# Altium PCB stm32c8t6.PcbDoc
Units mil, origin at the board's own origin, x right, y up, seen from the top; angles counter-clockwise.
Board outline 1600 x 1600 mil, 2 copper layers (Top Layer, Bottom Layer); 36 components, 50 nets, 186 pads, 52 vias.
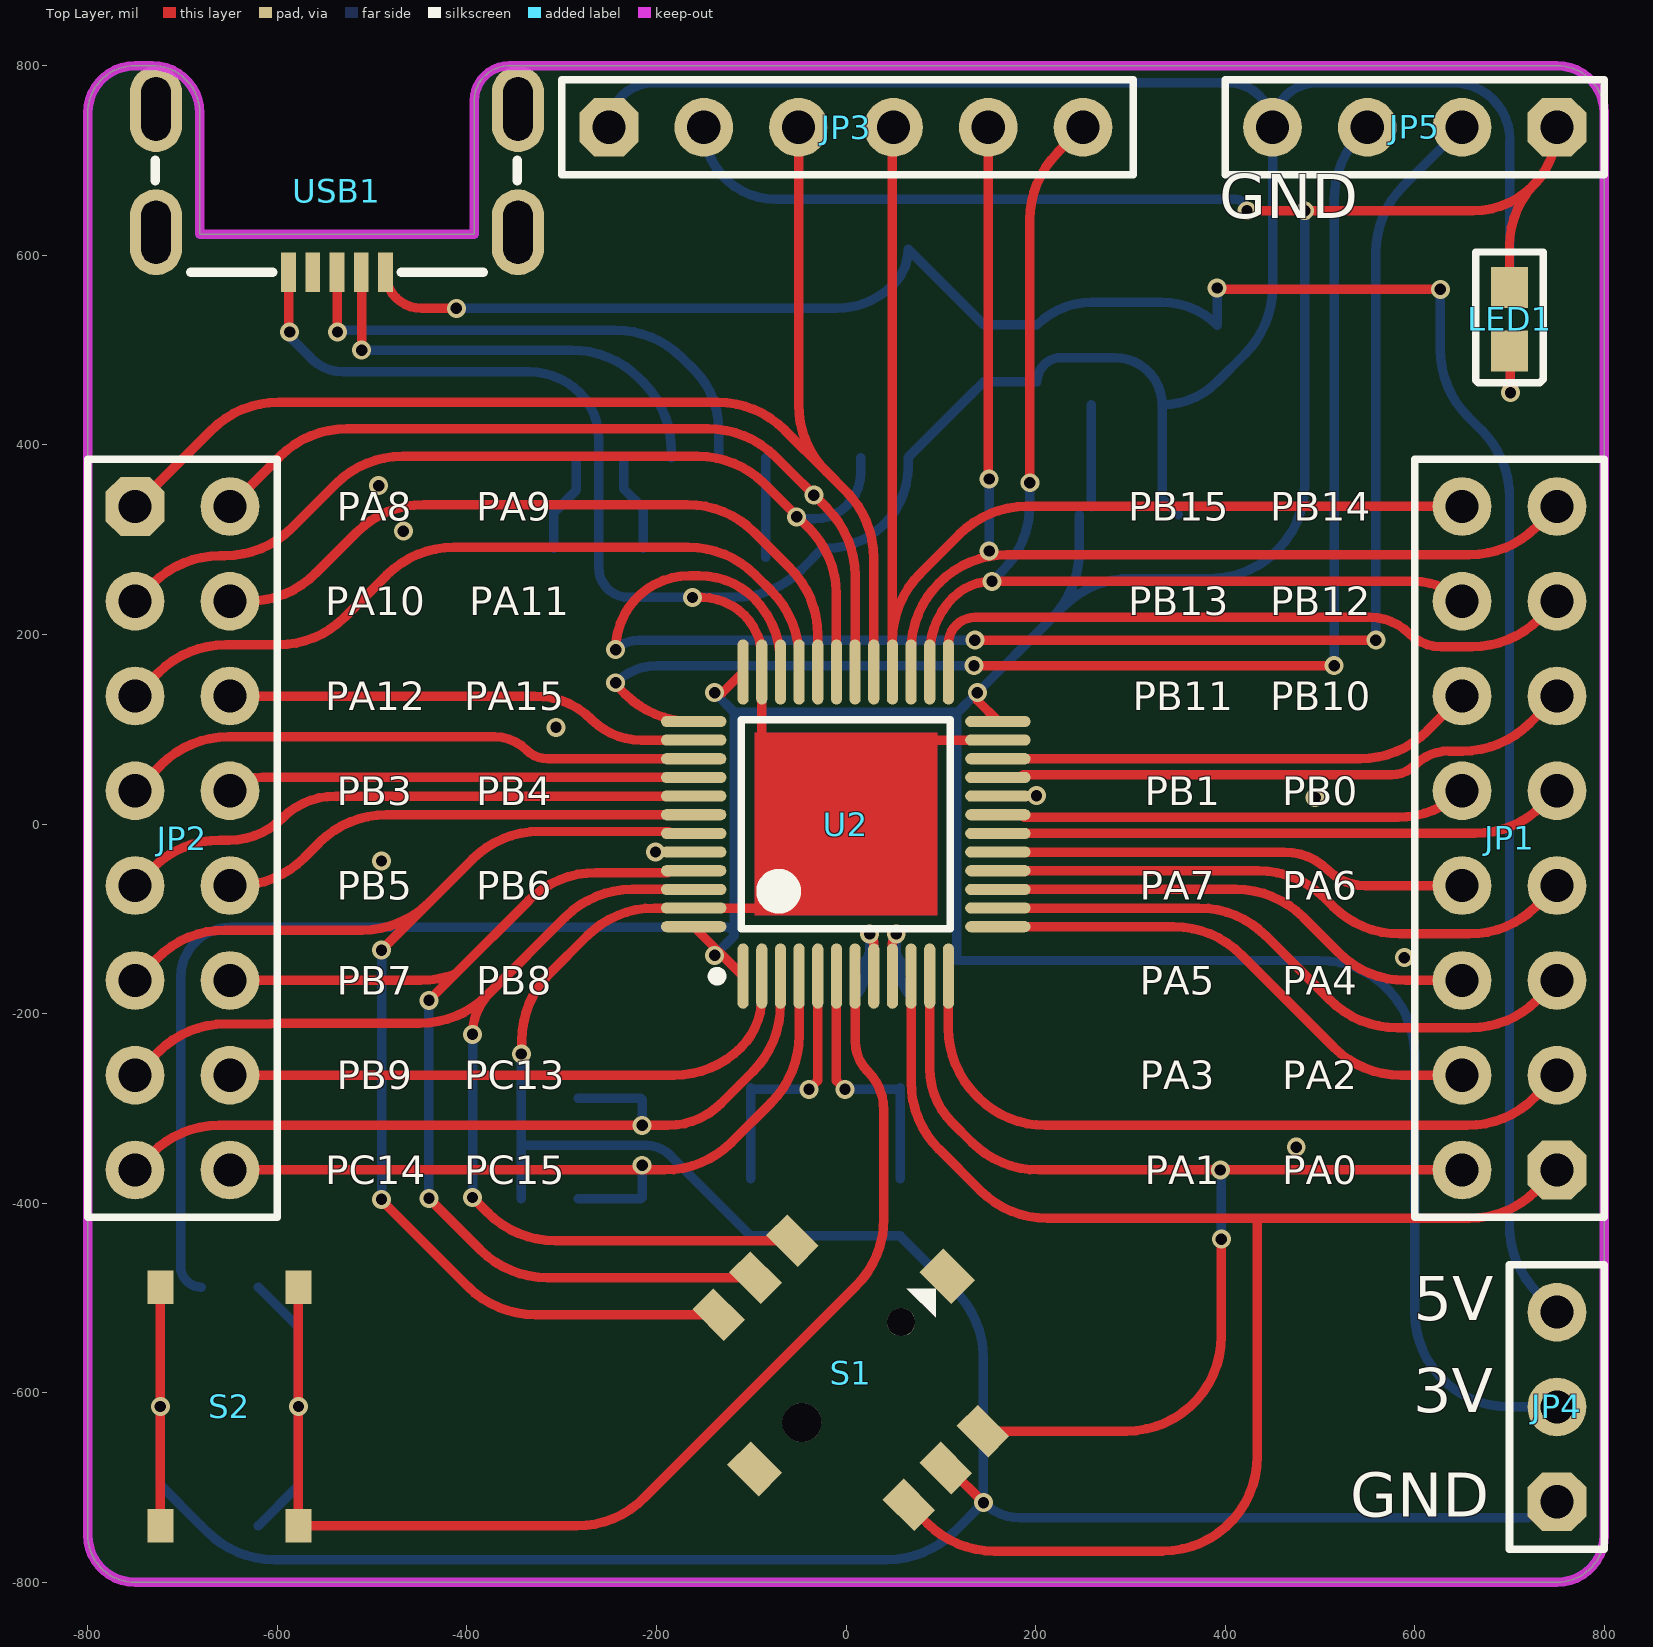
[diagram p0: Top Layer view]
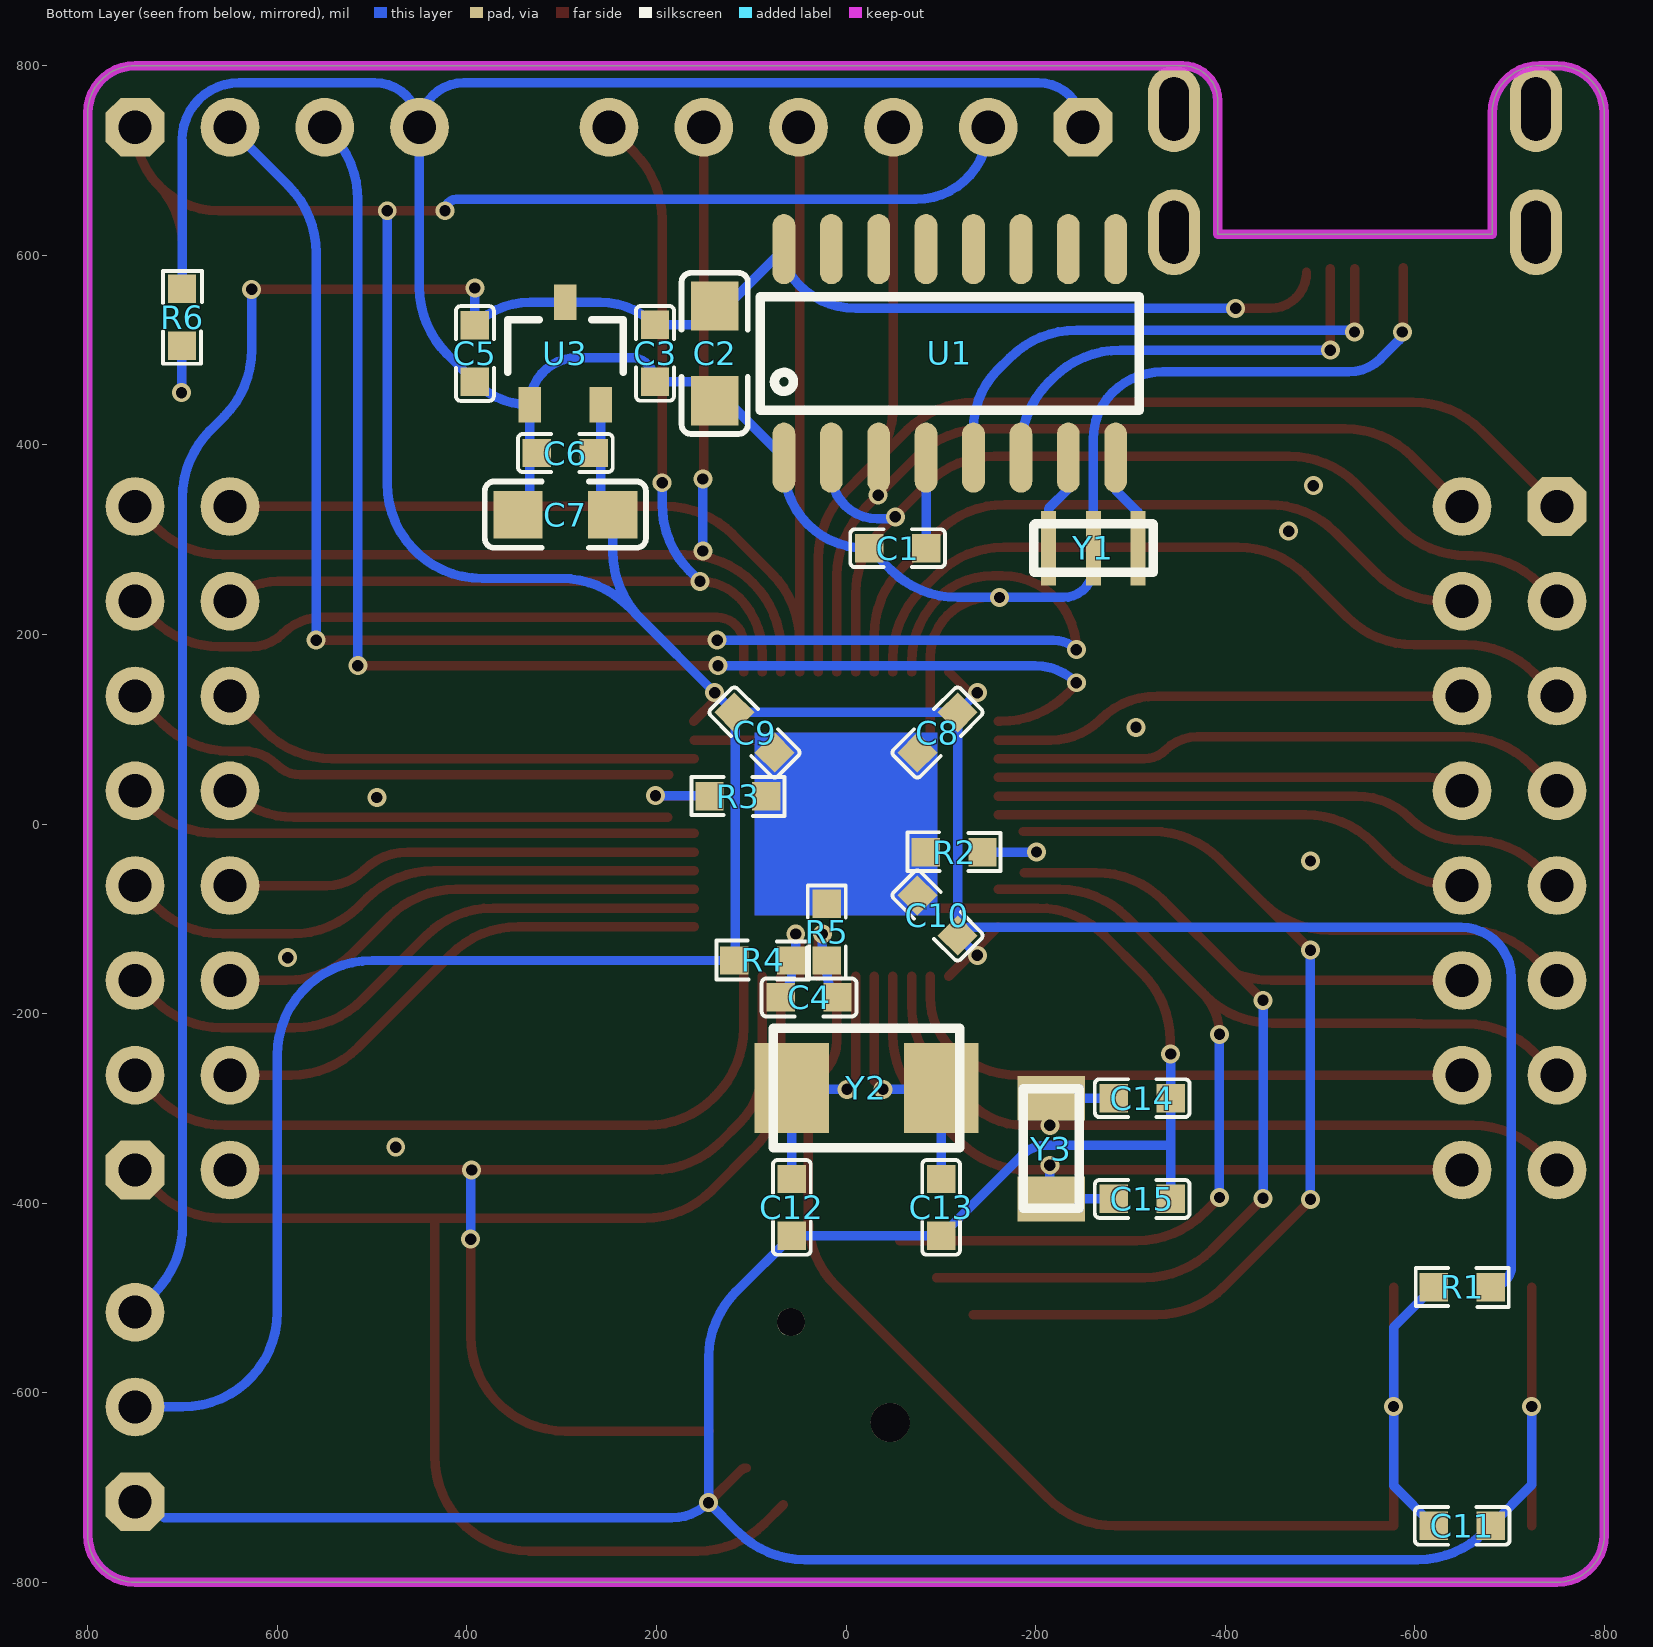
[diagram p1: Bottom Layer view, seen from below]
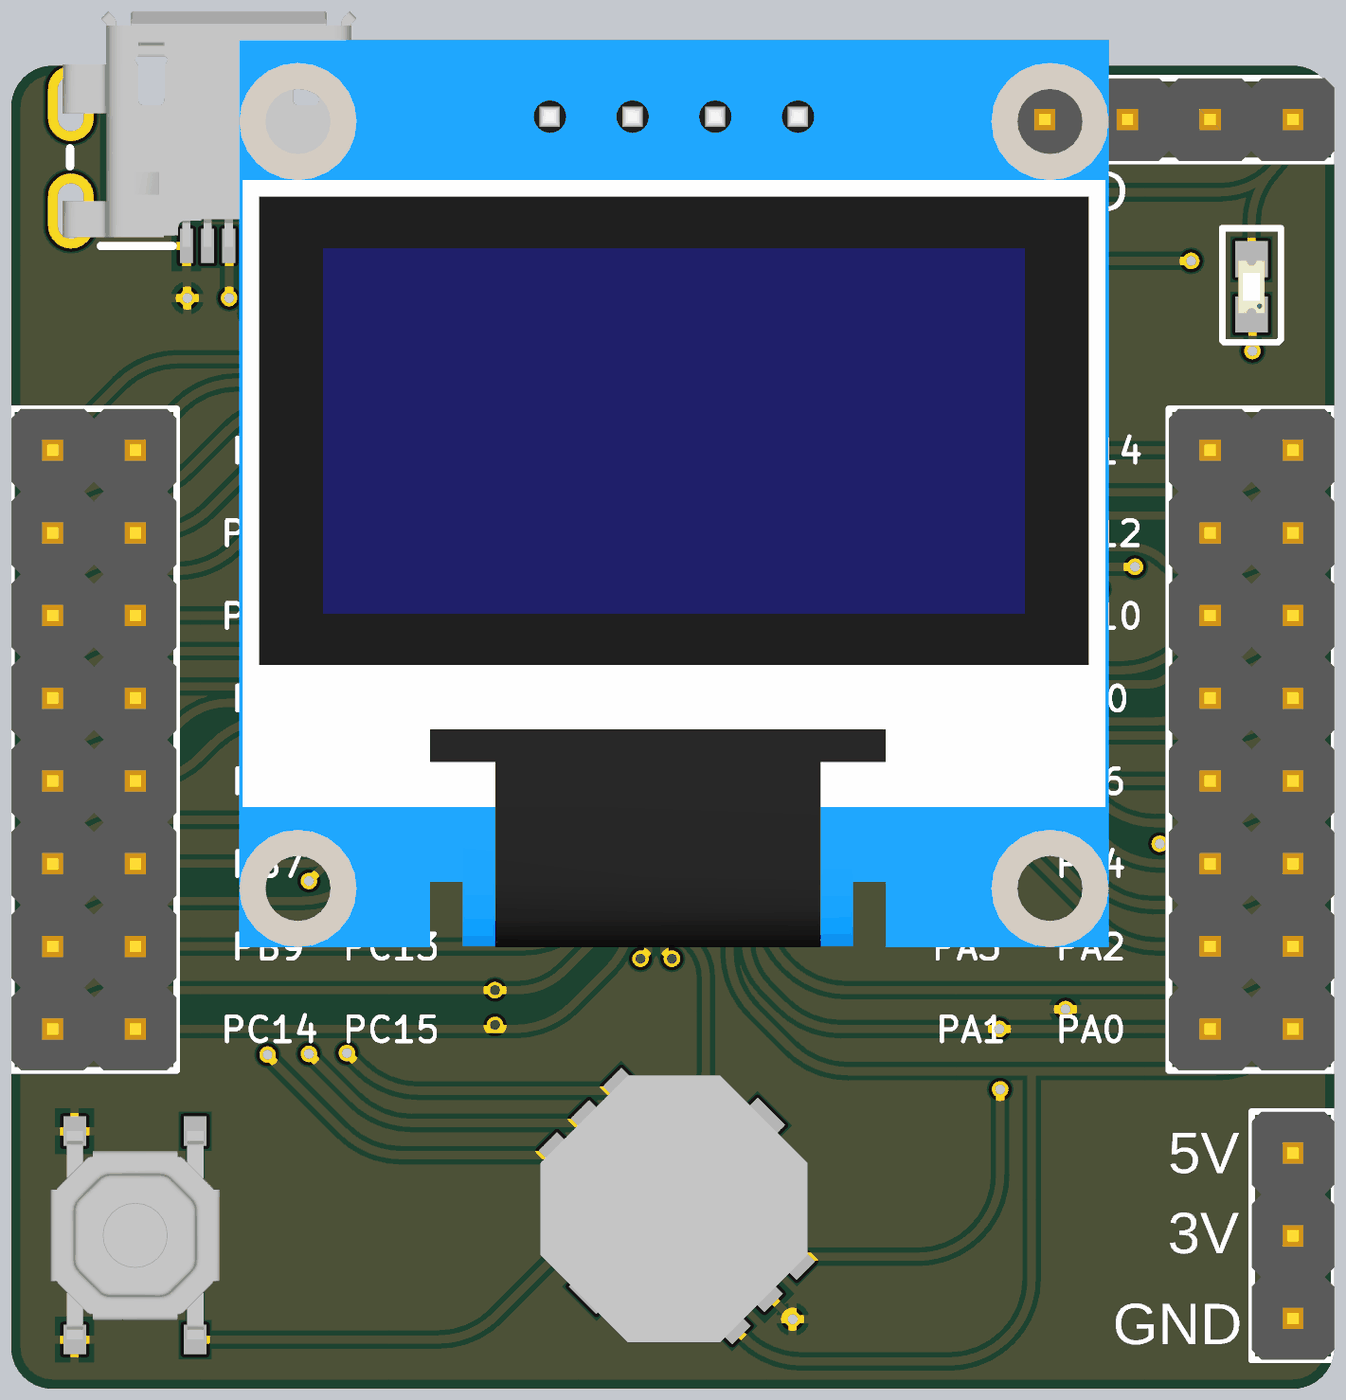
[diagram p2: 3D render of the assembled board from above, using the file's embedded part models]
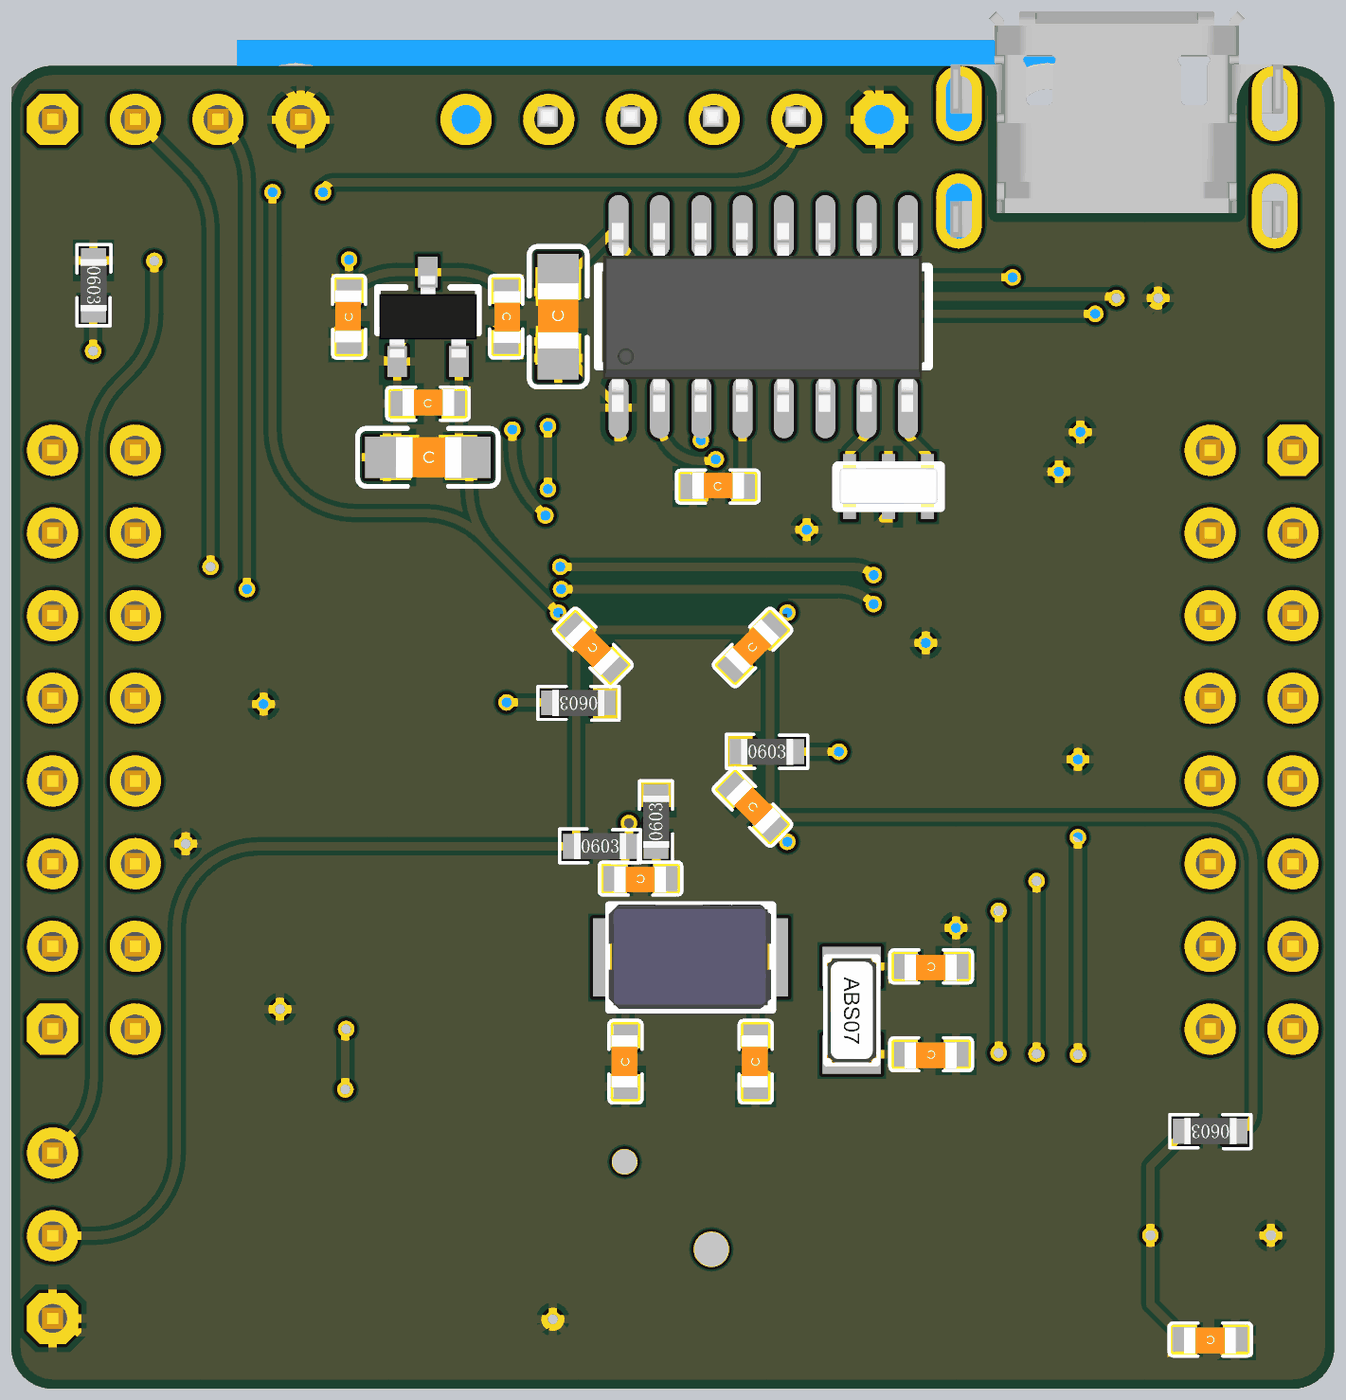
[diagram p3: 3D render of the assembled board from below, using the file's embedded part models]

## Layer stack, top to bottom
Top Solder: solder mask 0.4, Solder Resist, Dk 3.5
Top Layer: signal copper 1.4
Dielectric 1: dielectric 12.6, FR-4, Dk 4.8
Bottom Layer: signal copper 1.4
Bottom Solder: solder mask 0.4, Solder Resist, Dk 3.5

## Board outline
-800,-750 -800,750 cw(c-750,750) -750,800 -731.69,800 cw(c-731.69,750) -681.69,750 -681.69,622 -392.31,622 -392.31,762.68 cw(c-355,762.68) -355,800 750,800 cw(c750,750) 800,750 800,-750 cw(c750,-750) 750,-800 -750,-800 cw(c-750,-750)

## Design rules (kind name [scope] priority, off if disabled: settings)
Clearance [All] p1: gap=6 ignorepadtopadclearanceinfootprint=FALSE except(0: Arc-Hole Track-Hole SMDPad-Hole THPad-Hole Via-Hole Fill-Hole Poly-Hole Region-Hole Text-Hole)
ComponentClearance [All] p1: gap=0 collisioncheckmode=3 verticalgap=0 showdistances=FALSE
PolygonConnect [All] p1: connectstyle=Relief reliefconductorwidth=10 reliefentries=4 polygonreliefangle="90 Angle" airgapwidth=10
RoutingVias [All] p1: holewidth=28 width=50 viastyle="Through Hole" minholewidth=28 minwidth=50 maxholewidth=28 maxwidth=50
SolderMaskExpansion [All] p1: expansion=4
Width [All] p1: maxlimit=10 minlimit=10 preferedwidth=10
29 further rules are at their usual default settings.

## Components (designator, comment, footprint, x,y, rotation, side; value= is the part's Value field where it differs from the comment)
C1 "104" 0603_C -54.5,291 r180 bottom
C2 "10uF" 0805_c 138.5,451.5 r90 bottom
C3 "104" 0603_C 201.5,496.5 r270 bottom
C4 "104" 0603_C 39,-183 r0 bottom
C5 "104" 0603_C 391.5,496.39 r90 bottom
C6 "104" 0603_C 296.07,391.39 r180 bottom
C7 "105" 0805_c 341.07,326.39 r180 bottom
C8 "104" 0603_C -96.5,96.5 r135 bottom
C9 "104" 0603_C 96.5,96.5 r45 bottom
C10 "104" 0603_C -96.5,-96.5 r225 bottom
C11 "104" 0603_C -650.14,-740.48 r0 bottom
C12 "22pF" 0603_C 57.13,-404.5 r90 bottom
C13 "22pF" 0603_C -100.35,-404.5 r90 bottom
C14 "10pF" 0603_C -312.5,-289.24 r0 bottom
C15 "10pF" 0603_C -312.5,-395.54 r0 bottom
JP1 "header" header2X8 750,-365 r90 top
JP2 "header" header2X8 -750,335 r270 top
JP3 "OLED 6Pin" OLED_6Pin -250,735 r0 top
JP4 "header" header3 750,-715 r90 top
JP5 "header" header4 750,735 r180 top
LED1 "LED Chip" CLED1608-0603 700,532.6 r270 top
R1 "10K" 0603_R -650.14,-488.52 r0 bottom
R2 "10K" 0603_R -114,-29.6 r180 bottom
R3 "10K" 0603_R 114,29.46 r0 bottom
R4 "10Ω" 0603_R 87.71,-144 r180 bottom
R5 "0Ω" 0603_R 20.29,-114 r90 bottom
R6 "10K" 0603_R 700.5,534.53 r270 bottom
S1 "5 way switch" "5 way switch" 4.93,-579 r0 top
S2 "Key" "SWITCH 4*4" -650.5,-614.5 r90 top
U1 "CH340G" SOIC-16 65.5,386.5 r180 bottom
U2 "STM32F103C8T6" LQFP48 1.5,-0.5 r90 top
U3 "XC6206P332MR" SOT95P280X120-3N 296.07,496.39 r90 bottom
USB1 "USB_Mini" USB_Mini2 -537,582 r270 top
Y1 "XTAL 8Mhz 3215 3pin" "3213 3Pin" -261,291 r0 bottom
Y2 "8M" "5032 2Pin" -21.61,-278.5 r180 bottom
Y3 "XTAL 32.768KHz 2P" "3215 2Pin" -216.5,-342.39 r270 bottom

## Footprints (in the part's own frame and the unit in brackets; to place one, negate y for a bottom-side part, rotate by r counter-clockwise, add the part's x,y. Pads: shape width x height; smd on the part's side, far side on the other; paste and mask are expansions set on the pad)
"5 way switch" [mm]
  rect 1.2x0.9 smd rot 135: 0(-2.575,-2.575) 0(2.587,2.587)
  rect 1.2x0.8 smd rot 135: 1(-1.56,3.54) 2(-2.55,2.55) 3(-3.54,1.56) 4(1.56,-3.54) 5(2.55,-2.55) 6(3.54,-1.56)
  round 1.05 hole 1.05: 8(-1.31,-1.331)
  round 0.75 hole 0.75: 8(1.354,1.359)
  silkscreen extent 1.5,1.48 2.28,2.25, body extent -5.6,-5.61 5.43,5.42, height 4.6
0603_C [mil] "Capacitor"
  rect 30x30 smd: 1(-30,0) 2(30,0)
  silkscreen extent -50,-20 50,20, body extent -51,-18 52,21, height 35
0603_R [mil]
  rect 30x30 smd: 1(-30,0) 2(30,0)
  silkscreen extent -49,-20 49,21, body extent -32,-16 31,16, height 18
0805_c [mil]
  rect 52x50 smd: 1(-5,0) 2(95,0)
  silkscreen extent -40,-35 130,35, body extent -13,-28 105,28, height 37
"3213 3Pin" [mm]
  rect 0.4x2 smd: 1(-1.2,0) 2(0,0) 3(1.2,0)
  silkscreen extent -1.6,-0.65 1.6,0.65, body extent -1.6,-0.67 1.6,0.63, height 0.7
"3215 2Pin" [mm]
  rect 1.2x1.8 smd: 1(-1.35,0) 2(1.35,0)
  silkscreen extent -1.6,-0.75 1.6,0.75, body extent -1.61,-0.76 1.61,0.76, height 0.91
"5032 2Pin" [mm]
  rect 2x2.4 smd: 1(-2,0) 2(2,0)
  silkscreen extent -2.5,-1.6 2.5,1.6, body extent -2.53,-1.57 2.47,1.63, height 1.3
CLED1608-0603 [mm]
  rect 1.1x1 smd: 1(-0.85,0) 2(0.85,0)
  silkscreen extent -1.8,-0.9 1.7,0.9, body extent -0.8,-0.4 0.8,0.4, height 0.6
header2X8 [mil]
  oct 62x62 hole 35: 1(0,0)
  round 62 hole 35: 2(0,100) 3(100,0) 4(100,100) 5(200,0) 6(200,100) 7(300,0) 8(300,100) 9(400,0) 10(400,100) 11(500,0) 12(500,100) 13(600,0) 14(600,100) 15(700,0) 16(700,100)
  silkscreen extent -50,-50 750,150, body extent -50,-50 750,150, height 398
header3 [mil]
  oct 62x62 hole 35: 1(0,0)
  round 62 hole 35: 2(100,0) 3(200,0)
  silkscreen extent -50,-50 250,50, body extent -50,-50 250,50, height 398
header4 [mil]
  oct 62x62 hole 35: 1(0,0)
  round 62 hole 35: 2(100,0) 3(200,0) 4(300,0)
  silkscreen extent -50,-50 350,50, body extent -50,-50 350,50, height 398
LQFP48 [mm]
  oval 1.75x0.3 smd: 1(-4.064,2.794) 2(-4.064,2.294) 3(-4.064,1.794) 4(-4.064,1.294) 5(-4.064,0.794) 6(-4.064,0.294) 7(-4.064,-0.206) 8(-4.064,-0.706) 9(-4.064,-1.206) 10(-4.064,-1.706) 11(-4.064,-2.206) 12(-4.064,-2.706) 25(4.086,-2.706) 26(4.086,-2.206) 27(4.086,-1.706) 28(4.086,-1.206) 29(4.086,-0.706) 30(4.086,-0.206) 31(4.086,0.294) 32(4.086,0.794) 33(4.086,1.294) 34(4.086,1.794) 35(4.086,2.294) 36(4.086,2.794)
  oval 0.3x1.75 smd: 13(-2.739,-4.031) 14(-2.239,-4.031) 15(-1.739,-4.031) 16(-1.239,-4.031) 17(-0.739,-4.031) 18(-0.239,-4.031) 19(0.261,-4.031) 20(0.761,-4.031) 21(1.261,-4.031) 22(1.761,-4.031) 23(2.261,-4.031) 24(2.761,-4.031) 37(2.761,4.119) 38(2.261,4.119) 39(1.761,4.119) 40(1.261,4.119) 41(0.761,4.119) 42(0.261,4.119) 43(-0.239,4.119) 44(-0.739,4.119) 45(-1.239,4.119) 46(-1.739,4.119) 47(-2.239,4.119) 48(-2.739,4.119)
  silkscreen extent -4.19,-2.76 2.81,3.62, body extent -4.5,-4.44 4.5,4.56, height 1.56
OLED_6Pin [mil]
  oct 62x62 hole 35: 1(0,0)
  round 62 hole 35: 2(100,0) 3(200,0) 4(300,0) 5(400,0) 6(500,0)
  silkscreen extent -50,-50 553,50, body extent -274,-1001 777,96, height 255
SOIC-16 [mil]
  oval 24x74 smd: 1(0,0) 2(50,0) 3(100,0) 4(150,0) 5(200,0) 6(250,0) 7(300,0) 8(350,0) 9(350,220) 10(300,220) 11(250,220) 12(200,220) 13(150,220) 14(100,220) 15(50,220) 16(0,220)
  silkscreen extent -25,50 375,170, body extent -19,-5 367,223, height 69
SOT95P280X120-3N [mm] "SOT23, 3-Leads, Body 3.00x2.80mm, Pitch 0.95mm, IPC Medium Density"
  rect 0.95x0.6 smd: 1(-1.375,0.95) 2(-1.375,-0.95) 3(1.375,0)
  silkscreen extent -0.5,-1.55 0.9,1.55, body extent -1.25,-1.5 1.25,1.5, height 1.1
"SWITCH 4*4" [mm]
  rect 0.9x0.7 smd: 1(-3.2,1.85) 1(3.2,1.85) 2(-3.2,-1.85) 2(3.2,-1.85)
  body extent -3.2,-2.61 3.2,2.59, height 1.5
USB_Mini2 [mm]
  oval 2.3x1.4 hole 0.8 slot 1.7 at 0 deg: 0(-4.375,4.85) 0(-4.375,-4.85) 0(-1.075,4.85) 0(-1.075,-4.85)
  rect 1.05x0.4 smd: 1(0,1.3) 2(0,0.65) 3(0,0) 4(0,-0.65) 5(0,-1.3)
  Keep-Out Layer lines w0.254: -4.025,-3.675 -1.016,-3.675 -1.016,3.675 -3.95,3.675
  silkscreen extent -3,-4.87 0,4.82, body extent -7.2,-5.1 0.03,5.1, height 1.68

## Part data
C1 C2 C3 C4 C5 C6 C7 C8 C9 C10 C11 C12 C13 C14 C15: library part CAP, "Capacitor"
JP1 JP2: library part "HEADER 8X2"
JP4: library part "HEADER 3"
JP5: library part "HEADER 4"
LED1: "Typical Chip LED"
R1 R2 R3 R4 R5 R6: library part RES, "Resistor"
U1: "SOIC"
U2: "STM32 ARM-based 32-bit MCU with 64 Kbytes Flash, 48-pin LQFP, Industrial Temperature"
Y2: library part "XTAL 8Mhz 2pin"

## Via types
v1: diameter 20, hole 12, Top Layer to Bottom Layer, 52 vias

## Nets (pads, with @x,y where several pads share a name; then routed paths per layer and width w, separated by ;. In a path a pad name is that pad's centre, name@x,y a point inside that pad or via, vN(x,y) a via of type N, cw(c..) or ccw(c..) an arc to the next point about the centre after c; other vN are vias at no path point)
3V3: C6.2 C7.2 C8.2 C9.2 C10.2 JP3.2 JP4.2 JP5.1 LED1.1 R1.1 R4.1 U2.1 U2.24 U2.36 U2.48 U3.2 | length 5024.4
  Top Layer w10: U2.48 U2.1 ; v1(-138.5,138.5) -130.51,138.5 U2.36@-108.34,160.67 ; v1(138.5,138.5) 138.5,130.51 160.5,108.51 U2.24@160.67,108.34 ; v1(423,647) v1(484,647) 662,647 ccw(c662,735) 724.11,672.66 ; LED1.1 700,609.77 cw(c794.08,609.77) 724.11,672.66 ; JP5.1 cw(c662,735) 727.56,676.29 ; 724.11,672.66 cw(c794.08,609.77) 727.07,675.81 ; 727.07,675.81 cw(c794.08,609.77) 727.56,676.29 ; 727.07,675.81 727.56,676.29
  Bottom Layer w10: R1.1 cw(c-680.14,-466.65) -702,-466.65 -702,-162 cw(c-649,-162) -649,-109 -126.43,-109 cw(c-126.43,-117.71) C10.2 ; JP3.2 ccw(c-74,735) -74,659 411,659 cw(c411,647) v1(423,647) ; v1(-138.5,-138.5) C10.2 ; v1(-138.5,138.5) C8.2 ; R4.1@117,-144 117,115.99 cw(c119.44,115.99) C9.2 ; R4.1 500,-144 cw(c500,-244) 600,-244 600,-515 ccw(c700,-515) 700,-615 JP4.2 ; C7.2 246.07,287.49 cw(c146.07,287.49) 216.78,216.78 ; C7.2@258.67,334.56 U3.2 ; v1(484,647) 484,359 cw(c384,359) 384,259 300.42,259 ccw(c300.42,159) 229.71,229.71 216.78,216.78 ; C10.2 C8.2 ; C8.2 C9.2 ; C9.2 v1(138.5,138.5) 216.78,216.78
BOOT0: R2.2 U2.44 | length 57
  Bottom Layer w10: v1(-201,-29.6) R2.2
BOOT1: R3.2 U2.20 | length 98.1
  Top Layer w10: U2.20 199.69,29.46 ccw(c199.69,31.31) v1(201,30)
  Bottom Layer w10: R3.2 cw(c145.31,28.15) 145.31,30 v1(201,30)
"CH340 D+": U1.5 USB1.3 | length 556.7
  Top Layer w10: v1(-536.5,519) USB1.3@-536.5,586
  Bottom Layer w10: v1(-536.5,519) -534.5,521 -243.42,521 cw(c-243.42,421) -172.71,491.71 -160,479 cw(c-221.56,417.44) -136.95,437.95 cw(c-221.56,417.44) -134.5,417.44 U1.5
"CH340 D-": U1.6 USB1.2 | length 480.1
  Top Layer w10: USB1.2@-511,586 v1(-510.91,500)
  Bottom Layer w10: v1(-510.91,500) -289.42,500 cw(c-289.42,400) -218.71,470.71 -213.79,465.79 cw(c-284.5,395.08) -190.68,429.68 cw(c-284.5,395.08) -184.5,395.08 U1.6
"CH340 RXD": JP2.3 U1.2 U2.31 | length 1060.3
  Top Layer w10: JP2.3 -731.29,253.71 cw(c-660.58,183) -660.58,283 -655.42,283 ccw(c-655.42,383) -584.71,312.29 -538.29,358.71 cw(c-467.58,288) -467.58,388 -156.42,388 cw(c-156.42,288) -85.71,358.71 -39.37,312.37 cw(c-110.08,241.66) -10.08,241.66 U2.31
  Bottom Layer w10: v1(-52,324) ccw(c-50,324) -50,322 -33,322 ccw(c-33,370.5) 15.5,370.5 U1.2
"CH340 TXD": JP2.2 U1.3 U2.30 | length 870.7
  Top Layer w10: JP2.2 -597.29,387.71 cw(c-526.58,317) -526.58,417 -145.42,417 cw(c-145.42,317) -74.71,387.71 -19.69,332.69 cw(c-90.4,261.98) 9.6,261.98 U2.30
  other v1: -34,347
GND: C1.1 C2.1 C3.2 C5.1 C6.1 C7.1 C8.1 C9.1 C10.1 C11.1 C12.1 C13.1 C14.1 C15.1 JP3.1 JP4.1 JP5.4 R2.1 R3.1 R5.2 R6.1 S1.5 S2.1 U1.1 U2.23 U2.35 U2.47 U3.1 USB1.5 Y1.2 | length 6600.3
  Top Layer w10: S2.1@-723.33,-740.48 v1(-723.33,-614.5) S2.1@-723.33,-488.52 ; v1@-587.68,519.68 USB1.5@-587.68,587 ; v1@-342,-245 -342,-228.42 cw(c-242,-228.42) -312.71,-157.71 -272.94,-117.94 cw(c-202.23,-188.65) -202.23,-88.65 U2.47 -44.65,-88.65 ; v1(-162,239) -152.87,239 cw(c-152.87,174.13) -107,220 cw(c-150.88,176.12) -88.82,176.12 U2.35 -88.82,56.82 ; -1.5,17.5 -1.5,28.5 ; 7.5,28.5 40.5,28.5 ; 58.51,88.51 U2.23 ; S1.5 cw(c105.34,-686.83) 110.58,-681.58 v1(145,-716)
  Bottom Layer w10: v1(-723.33,-614.5) -723.33,-697.29 C11.1 -673.91,-746.71 ccw(c-603.2,-676) -603.2,-776 43.58,-776 ccw(c43.58,-676) 114.29,-746.71 v1(145,-716) ; v1(-587,519) ccw(c-574.93,519) -583.46,510.46 -564,491 ccw(c-530.2,524.8) -530.2,477 -334.11,477 cw(c-334.11,401.89) -281,455 cw(c-329.28,406.72) -263.69,425.69 cw(c-329.28,406.72) -261,406.72 Y1.2 -261,271 ccw(c-229,271) -253.9,250.9 ccw(c-229,271) -249.1,246.1 ccw(c-229,271) -229,239 -117.92,239 ccw(c-117.92,339) -47.21,268.29 C1.1 -20.5,291 ccw(c-20.5,377) 65.5,376.95 ccw(c-20.5,377) 65.5,377 U1.1 132,453 145.5,466.5 C3.2 cw(c227,466.5) 227,492 283.73,492 cw(c283.73,442.26) U3.1 ; C15.1 -342.5,-341 ; v1(-342.5,-242.66) C14.1 -342.5,-341 ; JP3.1 cw(c-203,735) -203,782 403,782 cw(c403,735) JP5.4 ; C7.1@350.5,326.39 333.47,343.42 U3.1 ; R6.1 700.5,721.5 ccw(c640,721.5) 640,782 497,782 ccw(c497,735) JP5.4 ; 719,-732 183.63,-732 cw(c183.63,-677.37) v1(145,-716) ; -342.5,-341 -340.5,-339 -211,-339 cw(c-211,-375.21) -185.39,-349.61 -100.5,-434.5 C13.1 C12.1 115.71,-493.08 cw(c45,-563.79) 145,-563.79 v1(145,-716) ; U3.1 ccw(c333.47,524.08) 391.33,466.22 C5.1 420.71,495.6 ccw(c350,566.31) 450,566.31 JP5.4
  other v1: 475,-341 589,-141 -490,-39 495,28 -306,102 -467,309 -493,357
KEY_1: JP2.13 S1.1 U2.46 | length 1230.6
  Top Layer w10: JP2.13 -725.29,-240.29 cw(c-654.58,-311) -654.58,-211 -613.42,-211 ccw(c-613.42,-111) -600.12,-210.11 -449.53,-210.11 ccw(c-449.53,-110.11) -378.82,-180.82 -375.64,-177.64 ccw(c-331.23,-222) v1(-394,-222) ; v1(-394,-394) -377.67,-410.33 ccw(c-306.96,-339.62) -306.96,-439.62 S1.1 ; -375.62,-177.62 -296.26,-98.26 cw(c-225.55,-168.97) -225.55,-68.97 U2.46
  Bottom Layer w10: v1(-394,-394) v1(-394,-222)
KEY_2: JP2.12 S1.2 U2.45 | length 1126
  Top Layer w10: JP2.12 -448.42,-165 ccw(c-448.42,-65) -412.22,-158.22 ; v1(-440,-395) -385.7,-449.3 ccw(c-314.99,-378.59) -314.99,-478.59 S1.2 ; v1(-440,-186) -412.22,-158.22 ; U2.45@-188,-51.28 -263.86,-51.28 ccw(c-263.86,-151.28) -334.57,-80.57 -412.22,-158.22
  Bottom Layer w10: v1(-440,-395) v1(-440,-186)
KEY_3: JP2.11 S1.3 U2.43 | length 1351.5
  Top Layer w10: JP2.11 -726.29,-141.29 cw(c-655.58,-212) -655.58,-112 -510.42,-112 ccw(c-510.42,-12) -439.71,-82.71 ; v1(-490,-396) -490,-397 -398.72,-488.28 ccw(c-328.01,-417.57) -328.01,-517.57 S1.3 ; v1(-490,-133) -439.71,-82.71 ; U2.43@-187,-7.91 -323.49,-7.91 ccw(c-323.49,-107.91) -394.2,-37.2 -439.71,-82.71
  Bottom Layer w10: v1(-490,-396) v1(-490,-133)
KEY_4: JP1.1 S1.4 U2.10 | length 1576.9
  Top Layer w10: S1.4 85.69,-737.71 ccw(c156.4,-667) 156.4,-767 334,-767 ccw(c334,-667) 434,-667 434,-418.41 cw(c437.41,-418.41) 435,-416 ; U2.10 68.66,-272.24 ccw(c168.66,-272.24) 97.95,-342.95 141.71,-386.71 ccw(c212.42,-316) 212.42,-416 435,-416 ; JP1.1 728.29,-386.71 cw(c657.58,-316) 657.58,-416 435,-416
KEY_5: JP1.2 S1.6 U2.11 | length 1199.7
  Top Layer w10: U2.11 88.34,-257.89 ccw(c169.11,-257.89) 112,-315 132.71,-335.71 ccw(c203.42,-265) 203.42,-365 JP1.2 ; S1.6 296,-640.43 ccw(c296,-540.43) 396,-540.43 v1(396,-438)
  Bottom Layer w10: v1(395,-365) cw(c392.59,-367.41) 396,-367.41 v1(396,-438)
NetC1_2: C1.2 U1.4 | length 105
  Bottom Layer w10: C1.2@-84.5,281.5 U1.4
NetLED1_2: LED1.2 R6.2 | length 94.1
  Top Layer w10: LED1.2 cw(c697.59,496.72) 701,496.72 v1(701,455)
  Bottom Layer w10: R6.2 cw(c699.3,503.33) 701,503.33 v1(701,455)
NetU1_7: U1.7 Y1.3 | length 104.1
  Bottom Layer w10: U1.7 -234.5,353.5 -213.76,332.76 Y1.3
NetU1_8: U1.8 Y1.1 | length 105.3
  Bottom Layer w10: Y1.1 -308.24,328.76 -284.5,352.5 U1.8
OLED_D/C: JP1.14 JP3.6 U2.26 | length 1142.5
  Top Layer w10: U2.26 88.34,179.47 cw(c172.53,179.47) 113,239 cw(c154.04,197.96) v1(154.04,256) 599.3,256 cw(c599.3,184.3) JP1.14 ; v1(194,360) 194,637.58 cw(c294,637.58) 223.29,708.29 JP3.6
  Bottom Layer w10: v1(154.04,256) 164.71,266.67 ccw(c94,337.38) 194,337.38 v1(194,360)
OLED_DI: JP1.16 JP3.4 U2.28 | length 1250.2
  Top Layer w10: U2.28 U2.28@48.97,193.55 ; JP3.4 ccw(c52.48,732.52) 48.97,732.52 U2.28@48.97,193.55 ; JP1.16 190.42,335 ccw(c190.42,235) 119.71,305.71 78.26,264.26 ccw(c148.97,193.55) U2.28@48.97,193.55
OLED_DO: JP2.1 JP3.3 U2.29 | length 1400.9
  Top Layer w10: JP2.1 -669.29,415.71 cw(c-598.58,345) -598.58,445 -135.42,445 cw(c-135.42,345) -64.71,415.71 -20.71,371.71 ; JP3.3 -50,442.42 ccw(c50,442.42) -20.71,371.71 ; 3.83,347.17 0,351 ; U2.29 29.29,280.29 ccw(c-70.71,280.29) 0,351 ; -20.71,371.71 0,351
OLED_RST: JP1.15 JP3.5 U2.27 | length 1223.4
  Top Layer w10: U2.27 68.66,183.24 cw(c168.66,183.24) 97.95,253.95 98.71,254.71 cw(c169.42,184) 169.42,284 657.58,284 ccw(c657.58,384) 728.29,313.29 JP1.15 ; v1@150,366 JP3.5
  Bottom Layer w10: v1(151,288) v1(151,364)
OSC32_IN: C14.2 JP2.15 U2.3 Y3.1 | length 888.8
  Top Layer w10: JP2.15 -732.29,-347.29 cw(c-661.58,-418) -661.58,-318 v1(-215,-318) -188,-318 ccw(c-188,-238.33) -131.67,-294.67 -98.43,-261.43 ccw(c-169.14,-190.72) -69.14,-190.72 U2.3
  Bottom Layer w10: C14.2 Y3.1 ; v1(-215,-318) Y3.1@-215,-290.74
OSC32_OUT: C15.2 JP2.16 U2.4 Y3.2 | length 837.6
  Top Layer w10: JP2.16 -191.42,-365 ccw(c-191.42,-265) -120.71,-335.71 -78.74,-293.74 ccw(c-149.45,-223.03) -49.45,-223.03 U2.4
  Bottom Layer w10: C15.2 Y3.2 ; Y3.2@-215,-394.04 v1(-215,-360)
OSC_IN: C13.2 U2.5 Y2.2 | length 277.7
  Top Layer w10: v1(-39,-280) -29.77,-270.77 U2.5
  Bottom Layer w10: C13.2 Y2.2 ; Y2.2@-97.35,-280 v1(-39,-280)
OSC_OUT: C12.2 U2.6 Y2.1 | length 276.5
  Top Layer w10: U2.6@-10.23,-160.5 -10.23,-270.77 v1(-1,-280)
  Bottom Layer w10: v1(-1,-280) Y2.1@56.13,-280 ; C12.2 Y2.1
PTA2: JP1.3 U2.12 | length 772.8
  Top Layer w10: U2.12 108.03,-215.61 ccw(c208.03,-215.61) 137.32,-286.32 139.71,-288.71 ccw(c210.42,-218) 210.42,-318 655.58,-318 ccw(c655.58,-218) 726.29,-288.71 JP1.3
PTA3: JP1.4 U2.13 | length 546.1
  Top Layer w10: U2.13 345.92,-108.34 cw(c345.92,-208.34) 416.63,-137.63 514.71,-235.71 ccw(c585.42,-165) 585.42,-265 JP1.4
PTA4: JP1.5 U2.14 | length 649.9
  Top Layer w10: U2.14 372.23,-88.65 cw(c372.23,-188.65) 442.94,-117.94 510.71,-185.71 ccw(c581.42,-115) 581.42,-215 658.58,-215 ccw(c658.58,-115) 729.29,-185.71 JP1.5
PTA5: JP1.6 U2.15 | length 521
  Top Layer w10: U2.15 411.55,-68.97 cw(c411.55,-168.97) 482.26,-98.26 519.71,-135.71 ccw(c590.42,-65) 590.42,-165 JP1.6
PTA6: JP1.7 U2.16 | length 625.7
  Top Layer w10: U2.16 434.86,-49.28 cw(c434.86,-149.28) 505.57,-78.57 513.71,-86.71 ccw(c584.42,-16) 584.42,-116 657.58,-116 ccw(c657.58,-16) 728.29,-86.71 JP1.7
PTA7: JP1.8 U2.17 | length 499.3
  Top Layer w10: U2.17 462.16,-29.6 cw(c462.16,-95.84) 509,-49 ccw(c547.63,-10.37) 547.63,-65 JP1.8
PTA11: JP2.4 U2.32 | length 765.5
  Top Layer w10: JP2.4 -630.42,235 ccw(c-630.42,335) -559.71,264.29 -516.29,307.71 cw(c-445.58,237) -445.58,337 -167.42,337 cw(c-167.42,237) -96.71,307.71 -59.06,270.06 cw(c-129.77,199.35) -29.77,199.35 U2.32
PTA12: JP2.5 U2.33 | length 831.4
  Top Layer w10: JP2.5 -725.29,159.71 cw(c-654.58,89) -654.58,189 -599.42,189 ccw(c-599.42,289) -528.71,218.29 -484.29,262.71 cw(c-413.58,192) -413.58,292 -166.42,292 cw(c-166.42,192) -95.71,262.71 -78.74,245.74 cw(c-149.45,175.03) -49.45,175.03 U2.33
PTA13: JP5.2 U2.34 | length 1661.1
  Top Layer w10: v1(-243,184) cw(c-165,184) -165,262 -154.94,262 cw(c-154.94,180.06) -97,238 cw(c-164.27,170.73) -69.14,170.73 U2.34 ; v1(136,194) v1(559,194)
  Bottom Layer w10: v1(-243,184) cw(c-218.86,159.86) -218.86,194 v1(136,194) ; v1(559,194) 559,602.58 cw(c659,602.58) 588.29,673.29 JP5.2
PTA14: JP5.3 U2.37 | length 1437.1
  Top Layer w10: v1(-243,149) -243,147 -233.49,137.49 ccw(c-162.78,208.2) -162.78,108.2 U2.37 ; v1(135,167) v1(515,167)
  Bottom Layer w10: v1(-243,149) cw(c-199.54,105.54) -199.54,167 v1(135,167) ; v1(515,167) 515,658.58 cw(c615,658.58) 544.29,729.29 JP5.3
PTA15: JP2.6 U2.38 | length 501.8
  Top Layer w10: JP2.6 -328.36,135 cw(c-328.36,49.64) -268,110 ccw(c-216.12,161.88) -216.12,88.51 U2.38
PTB0: JP1.9 U2.18 | length 604.1
  Top Layer w10: U2.18 663.67,-9.91 ccw(c663.67,90.09) 734.38,19.38 JP1.9
PTB1: JP1.10 U2.19 | length 469.5
  Top Layer w10: U2.19@188,7 582.4,7 ccw(c582.4,102.6) JP1.10
PTB3: JP2.7 U2.39 | length 614.8
  Top Layer w10: JP2.7 -722.29,62.71 cw(c-651.58,-8) -651.58,92 -370.8,92 cw(c-370.8,44.2) -337,78 ccw(c-314.86,100.14) -314.86,68.83 U2.39
PTB4: JP2.8 U2.40 | length 493.1
  Top Layer w10: JP2.8 cw(c-615.86,0.86) -615.86,49.14 U2.40
PTB5: JP2.9 U2.41 | length 617.3
  Top Layer w10: JP2.9 -731.29,-46.29 cw(c-660.58,-117) -660.58,-17 -650.53,-17 ccw(c-650.53,61.53) -595,6 cw(c-538.37,-50.63) -538.37,29.46 U2.41
PTB6: JP2.10 U2.42 | length 511.7
  Top Layer w10: JP2.10 -642.42,-65 ccw(c-642.42,35) -571.71,-35.71 -555.52,-19.52 cw(c-484.81,-90.23) -484.81,9.77 U2.42
PTB10: JP1.11 U2.21 | length 589.4
  Top Layer w10: U2.21@187,51.92 575.67,51.92 ccw(c575.67,86.33) 600,62 cw(c636.21,25.79) 636.21,77 650.58,77 ccw(c650.58,177) 721.29,106.29 JP1.11
PTB11: JP1.12 U2.22 | length 512.9
  Top Layer w10: U2.22 542.41,68.83 ccw(c542.41,168.83) 613.12,98.12 JP1.12
PTB12: JP1.13 U2.25 | length 711.5
  Top Layer w10: U2.25 108.03,190.03 cw(c136,190.03) 136,218 552.96,218 cw(c552.96,159.96) 594,201 ccw(c627.8,234.8) 627.8,187 660.58,187 ccw(c660.58,287) 731.29,216.29 JP1.13
PTC13: JP2.14 U2.2 | length 628.2
  Top Layer w10: JP2.14 -181.42,-265 ccw(c-181.42,-165) -110.71,-235.71 ccw(c-163.55,-182.87) -88.82,-182.87 U2.2
RESET: C11.2 R1.2 S2.2 U2.7 | length 1570.8
  Top Layer w10: S2.2@-577.67,-488.52 v1(-577.67,-614.5) -577.67,-740.48 -283.91,-740.48 ccw(c-283.91,-640.48) -213.2,-711.19 10.71,-487.29 ccw(c-60,-416.58) 40,-416.58 40,-302.04 ccw(c-18.04,-302.04) 23,-261 cw(c55.35,-228.65) 9.6,-228.65 U2.7
  Bottom Layer w10: C11.2 -577.67,-698.01 v1(-577.67,-614.5) -577.67,-530.99 R1.2
VBUS: C2.2 C3.1 C5.2 JP4.3 U1.16 U3.3 USB1.1 | length 2370.5
  Top Layer w10: USB1.1 ccw(c-447.82,582) -447.82,544 v1(-411,544) ; v1(391.5,565.5) 392,566 394,564 v1(627,564)
  Bottom Layer w10: v1(-411,544) -10.28,544 ccw(c-10.28,629.16) 49.94,568.94 ccw(c12.39,606.5) U1.16 132,540 145.5,526.5 C3.1 cw(c259.5,468.5) 259.5,550.52 U3.3 333.24,550.52 cw(c333.24,468.13) C5.2 v1(391.5,565.5) ; v1(627,564) 627,500.42 ccw(c727,500.42) 656.29,429.71 670.71,415.29 cw(c600,344.58) 700,344.58 700,-423.58 ccw(c800,-423.58) 729.29,-494.29 JP4.3
VDDA: C4.2 R4.2 U2.9 | length 116.9
  Top Layer w10: U2.9 48.97,-125.72 cw(c62.72,-125.72) v1(53,-116)
  Bottom Layer w10: v1(53,-116) 53,-134.34 ccw(c66.66,-134.34) 57,-144 57,-154.03 ccw(c97.97,-154.03) C4.2
VSSA: C4.1 R5.1 U2.8 | length 116.9
  Top Layer w10: v1(25,-116) cw(c14.65,-126.35) 29.29,-126.35 U2.8
  Bottom Layer w10: C4.1 ccw(c-18.25,-155.75) 20.29,-155.75 R5.1 ccw(c8.91,-132.62) 25,-132.62 v1(25,-116)
pads on no net: S1.0 S1.8 U1.9 U1.10 U1.11 U1.12 U1.13 U1.14 U1.15 USB1.0 USB1.4

## Polygon pours and split planes (outlines as drawn)
GND on Bottom Layer "AutoNaming" (solid, remove dead copper, shelved, pour order 2): -903,906 807,906 cw(c807,806) 907,806 907,-893 cw(c886,-893) 886,-914 -971,-914
GND on Top Layer "AutoNaming" (solid, remove dead copper, shelved, pour order 4): -955,981 841,981 cw(c841,881) 941,881 941,-943 ccw(c882,-943) 882,-884 -1099,-884

## Keep-outs
Keep-Out Layer:
  lines w10: -681.69,740.46 -681.69,750 ccw(c-731.69,750) -731.69,800 -750,800 ccw(c-750,750) -800,750 -800,-522 -800,-750 ccw(c-750,-750) -750,-800 750,-800 ccw(c750,-750) 800,-750 800,750 ccw(c750,750) 750,800 -355,800 ccw(c-355,762.68) -392.31,762.68 -392.31,737.51

## Other copper
Top Layer:
  region net GND: 96.5,96.5 -96.5,96.5 -96.5,-96.5 96.5,-96.5
Bottom Layer:
  region net GND: 96.5,96.5 -96.5,96.5 -96.5,-96.5 96.5,-96.5

## Silkscreen, mask and mechanical layers (free items; w line width, h text height)
Top Overlay:
  text "GND" at 394,624 h80
  text "PA8" at -537,320.01 h30
  text "PA9" at -389.99,320.01 h30
  text "PB15" at 297.52,320.01 h30
  text "PB14" at 447.52,320.01 h30
  text "PA10" at -549.5,220.01 h30
  text "PA11" at -397.48,220.01 h30
  text "PB13" at 297.52,220.01 h30
  text "PB12" at 447.52,220.01 h30
  text "PA12" at -549.5,120.01 h30
  text "PA15" at -402.48,120.01 h30
  text "PB11" at 302.52,120.01 h30
  text "PB10" at 447.52,120.01 h30
  text "PB3" at -537,20.01 h30
  text "PB4" at -389.99,20.01 h30
  text "PB1" at 315.01,20.01 h30
  text "PB0" at 460.01,20.01 h30
  text "PB5" at -537,-80 h30
  text "PB6" at -389.99,-79.99 h30
  text "PA7" at 310.01,-79.99 h30
  text "PA6" at 460.01,-79.99 h30
  text "PB7" at -537,-179.99 h30
  text "PB8" at -389.99,-179.99 h30
  text "PA5" at 310.01,-179.99 h30
  text "PA4" at 460.01,-179.99 h30
  text "PB9" at -537,-279.99 h30
  text "PC13" at -402.48,-279.99 h30
  text "PA3" at 310.01,-279.99 h30
  text "PA2" at 460.01,-279.99 h30
  text "PC14" at -549.5,-379.99 h30
  text "PC15" at -402.48,-379.99 h30
  text "PA1" at 315.01,-379.99 h30
  text "PA0" at 460.01,-379.99 h30
  text "5V" at 599.04,-539 h80
  text "3V" at 598.53,-636 h80
  text "GND" at 532,-746 h80
Top Solder:
  drawing of 620 lines, arcs and shapes, not listed